# Altium PCB PCB2.PcbDoc
Units mm, origin at the board's own origin, x right, y up, seen from the top; angles counter-clockwise.
Board outline 86.42 x 78.14 mm, 2 copper layers (Top Layer, Bottom Layer); 28 components, 24 nets, 76 pads, 0 vias.
Unrouted connection lines stored in the file: 4.
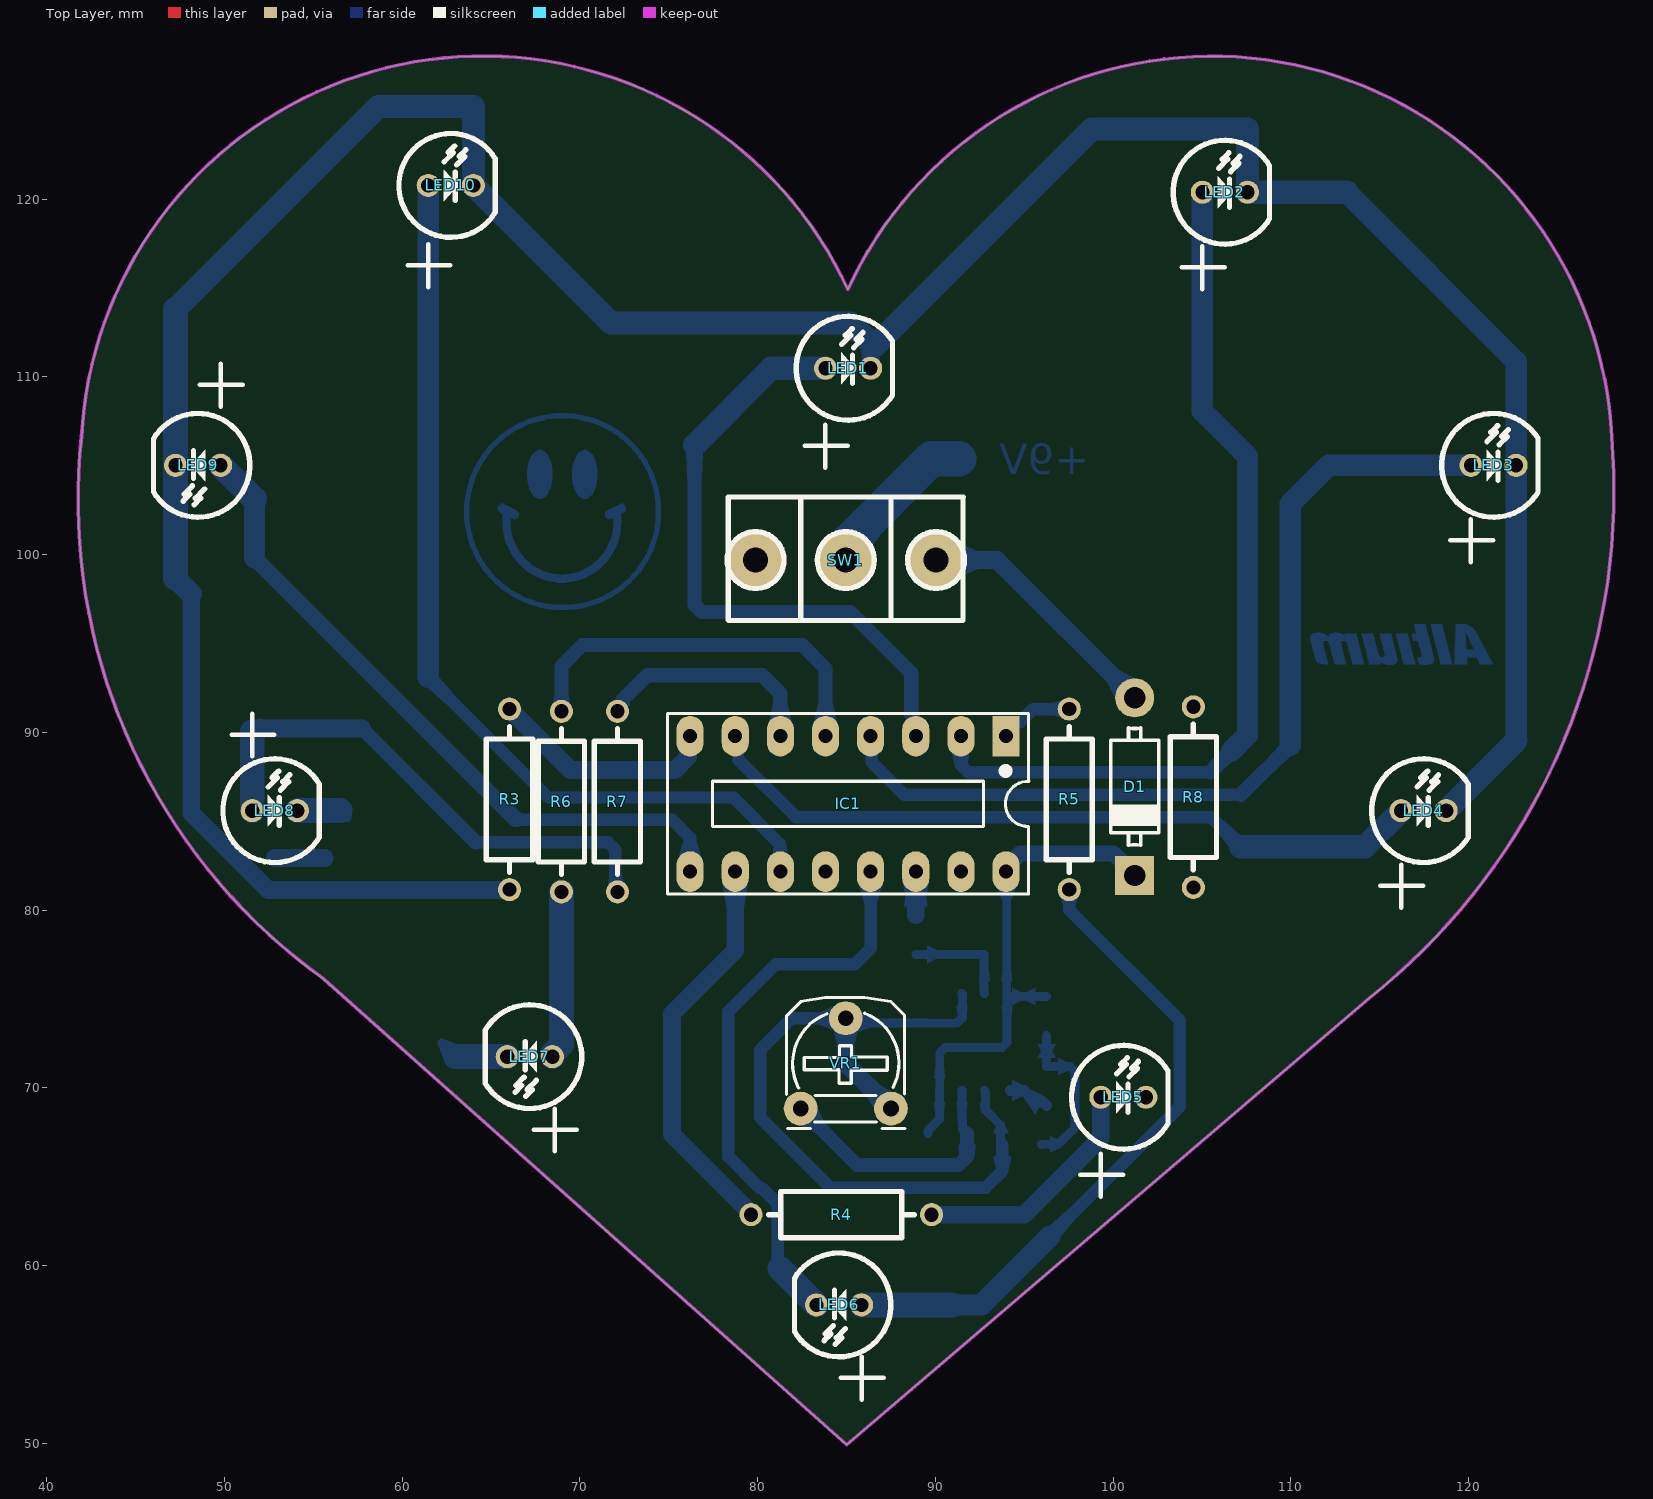
[diagram p0: Top Layer view]
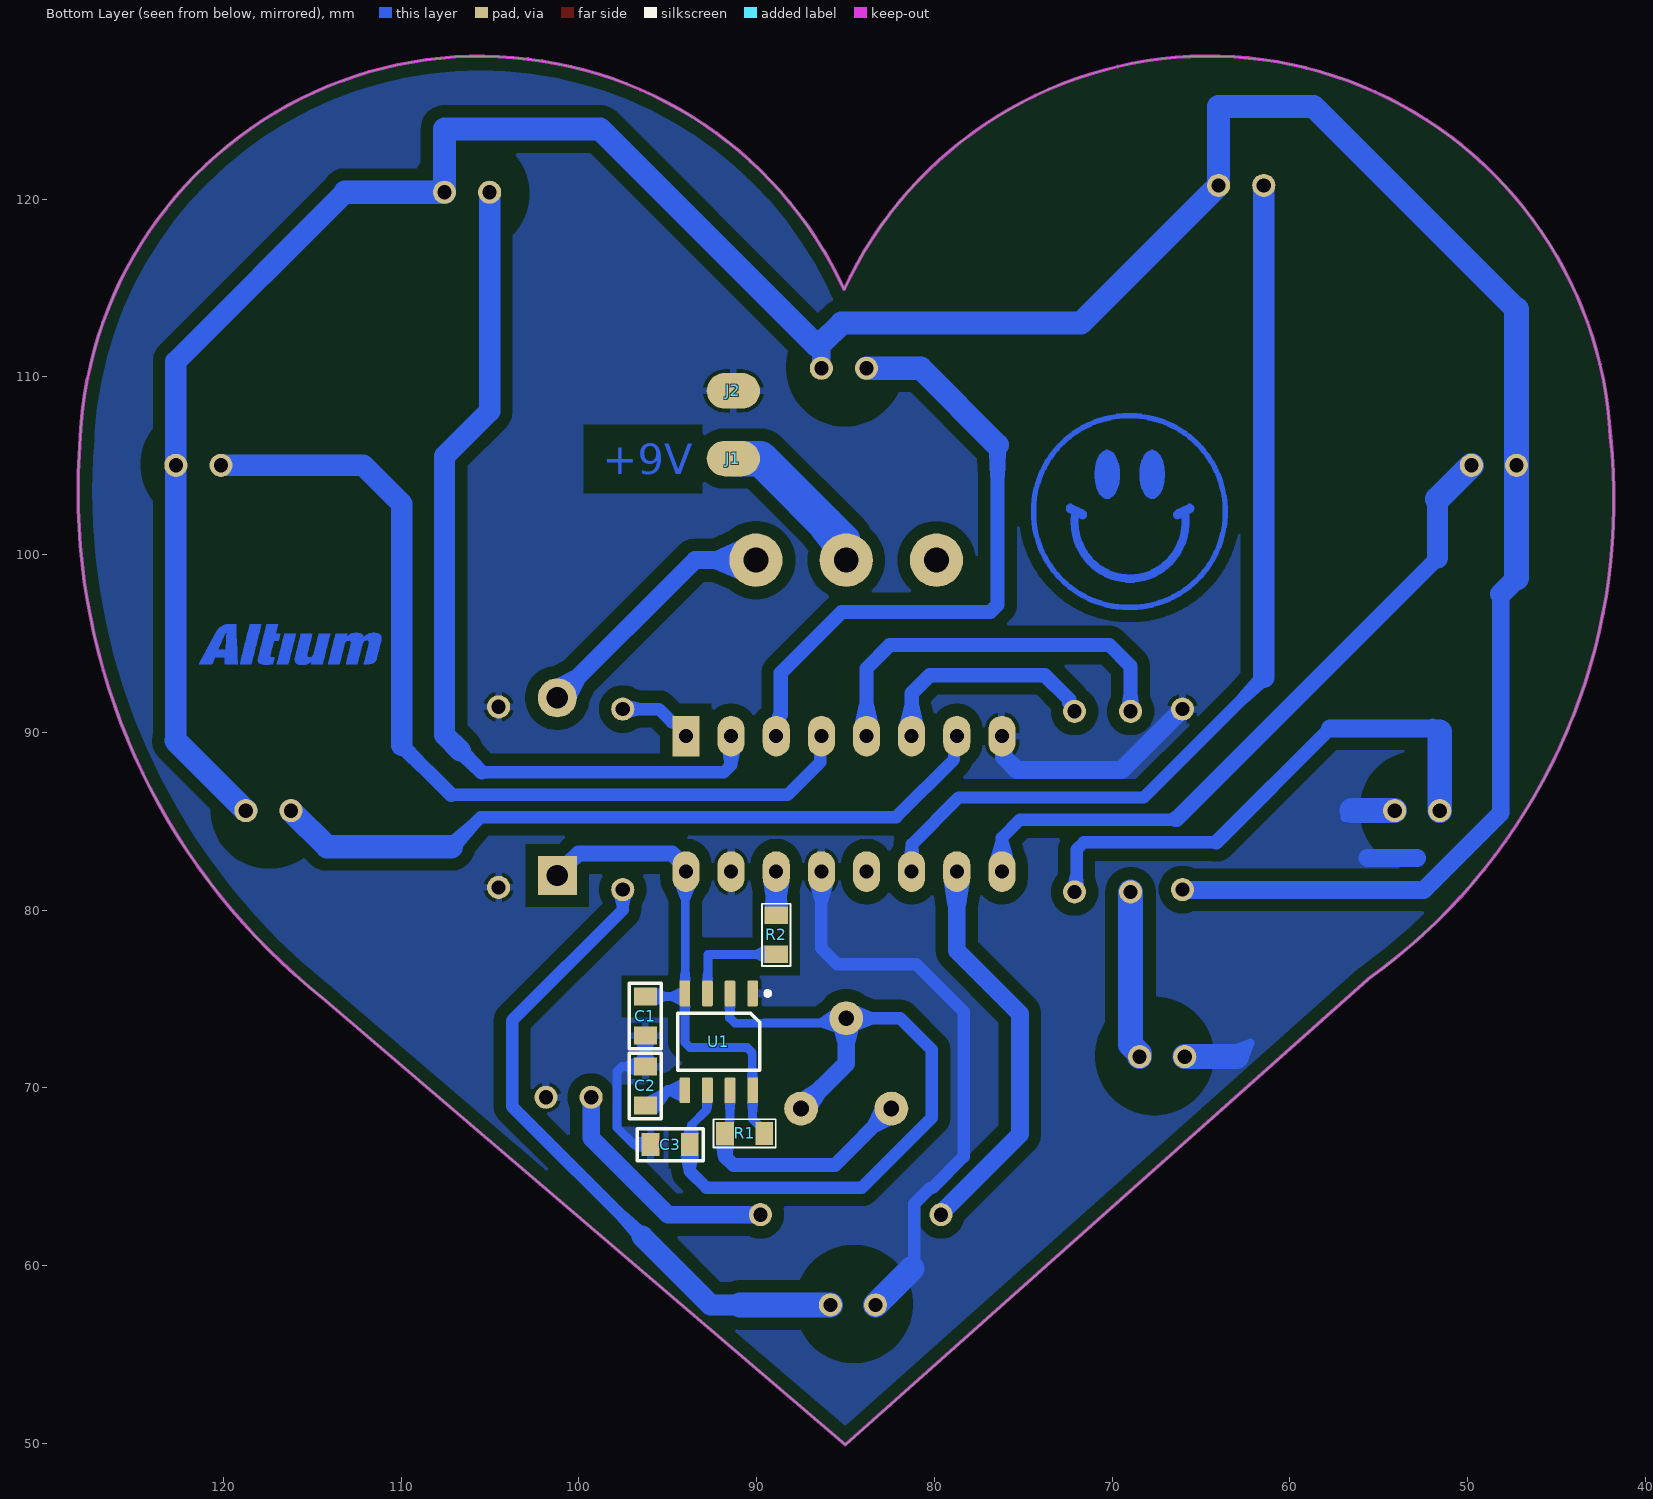
[diagram p1: Bottom Layer view, seen from below]
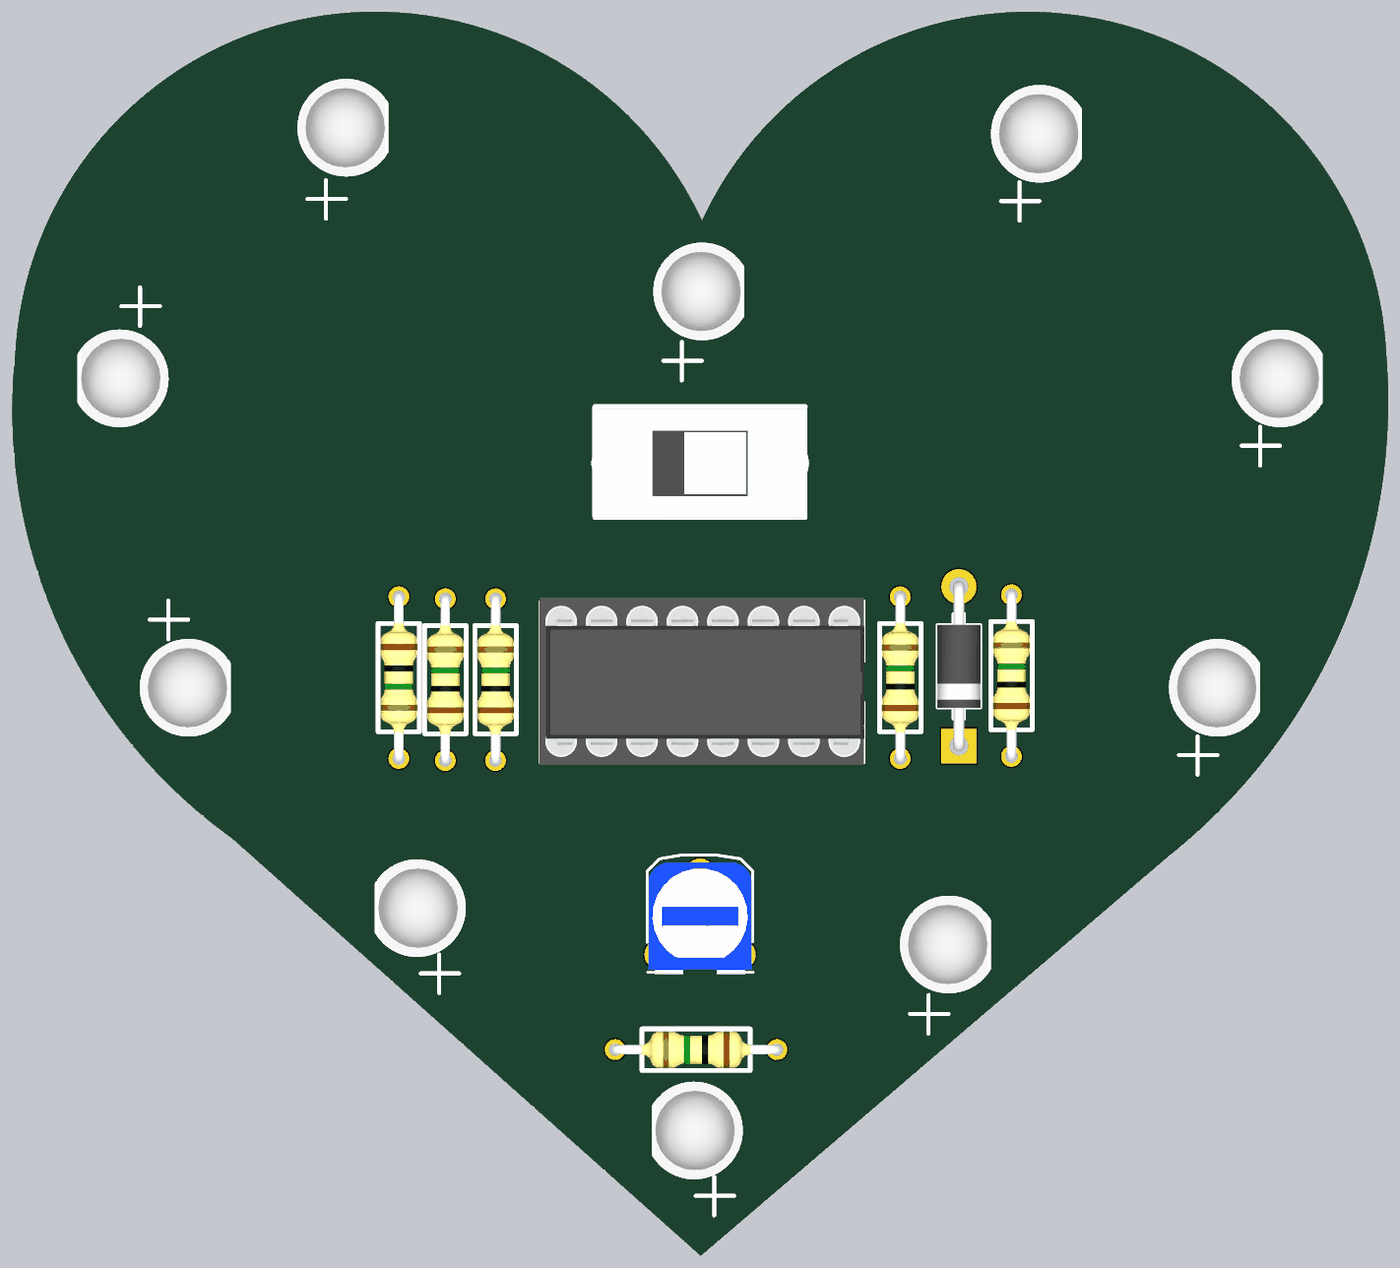
[diagram p2: 3D render of the assembled board from above, using the file's embedded part models]
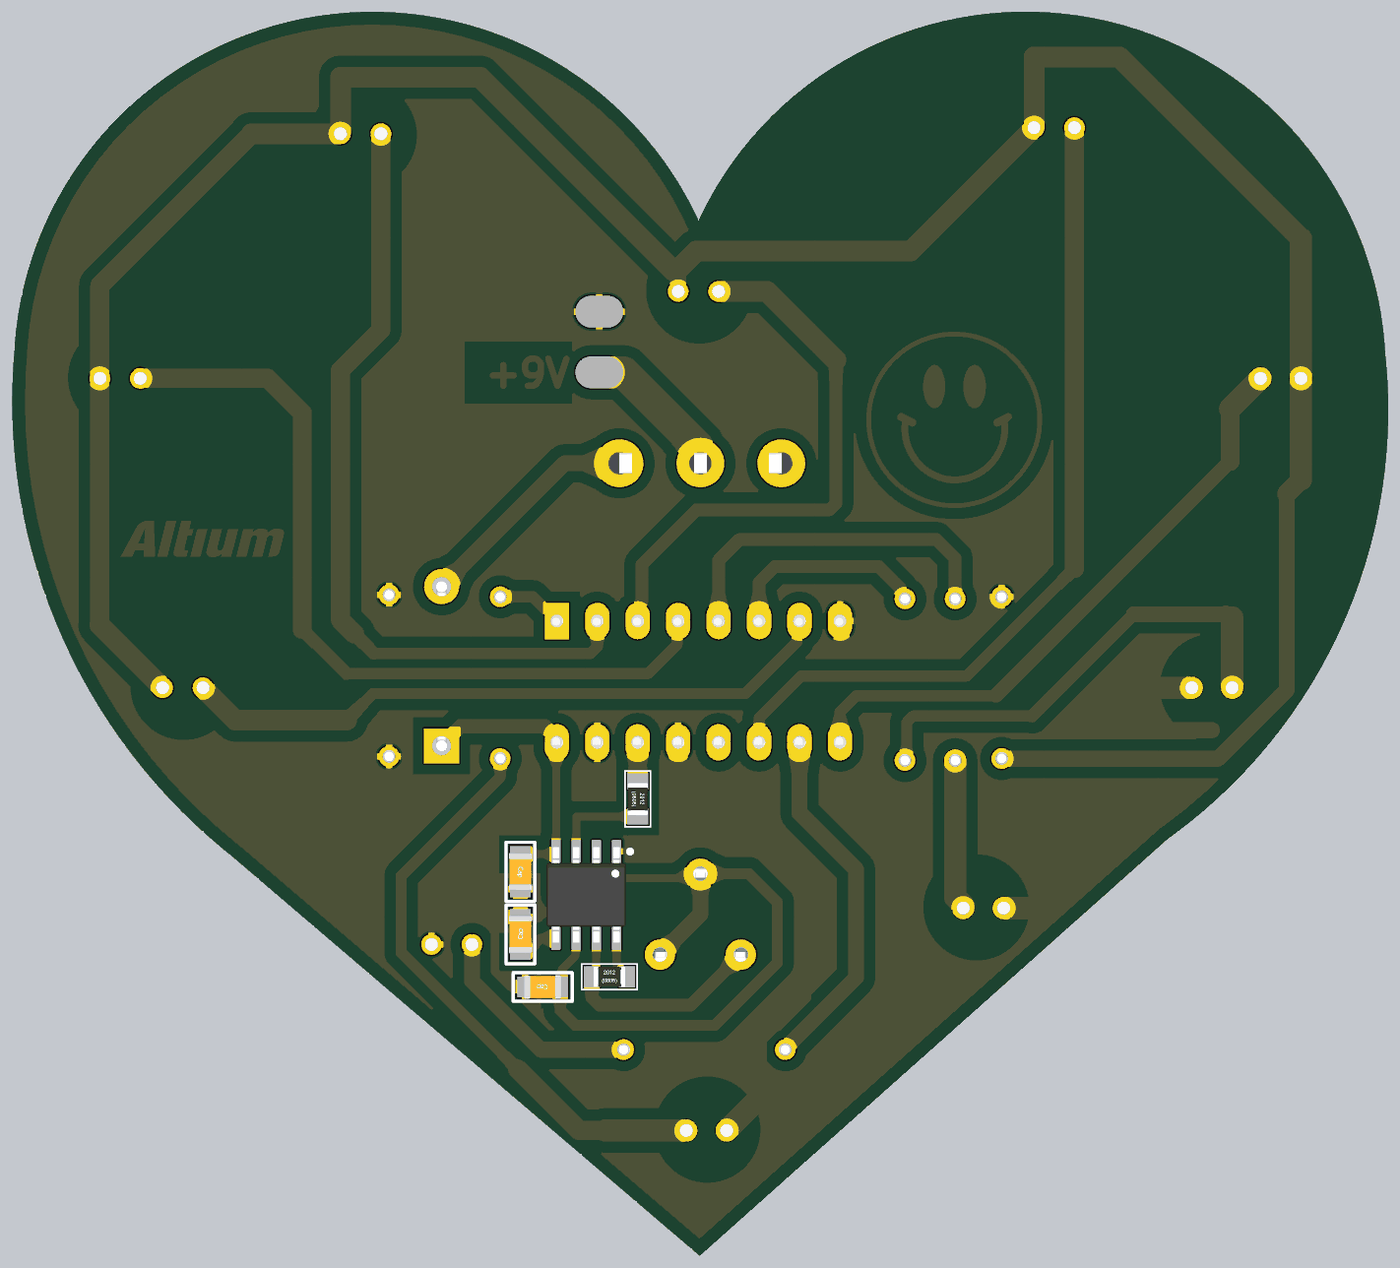
[diagram p3: 3D render of the assembled board from below, using the file's embedded part models]

## Layer stack, top to bottom
Top Solder: solder mask 0.0102, Solder Resist, Dk 3.5
Top Layer: signal copper 0.0356
Dielectric 1: dielectric 0.32, FR-4, Dk 4.8
Bottom Layer: signal copper 0.0356
Bottom Solder: solder mask 0.0102, Solder Resist, Dk 3.5

## Board outline
55.602,76.114 85.006,49.917 114.411,75.042 ccw(c91.743,103.577) 128.056,106.642 ccw(c105.554,105.522) 85.081,114.925 ccw(c64.545,105.438) 41.956,106.642 ccw(c74.88,103.045)

## Design rules (kind name [scope] priority, off if disabled: settings)
Clearance Clearance_1 [InPolygon] p1: gap=0.7 ignorepadtopadclearanceinfootprint=TRUE
Clearance [All] p2: gap=0.5 ignorepadtopadclearanceinfootprint=TRUE
PolygonConnect [All] p1: connectstyle=Relief reliefconductorwidth=0.4 reliefentries=4 polygonreliefangle="90 Angle" airgapwidth=0.2
RoutingVias [All] p1: holewidth=0.711 width=1.27 viastyle="Through Hole" minholewidth=0.711 minwidth=1.27 maxholewidth=0.711 maxwidth=1.27
SolderMaskExpansion [All] p1: expansion=0.102 istentingtop=FALSE
Width [All] p1: maxlimit=3 minlimit=0.5 preferedwidth=1
30 further rules are at their usual default settings.

## Components (designator, comment, footprint, x,y, rotation, side; value= is the part's Value field where it differs from the comment)
C1 "30pF-0805" CAP0805 96.266,74.041 r270 bottom
C2 "30pF-0805" CAP0805 96.266,70.104 r90 bottom
C3 "30pF-0805" CAP0805 94.869,66.802 r0 bottom
D1 "1KV/1A" DIO-DO41(DO-204AL)-10P-THR 101.219,86.948 r270 top
IC1 "4017" DIP16/W0.3 93.98,89.789 r180 top value=CD4017
J1 "Pad" pad_smd_2x3 91.313,105.41 r90 bottom
J2 "Pad" pad_smd_2x3 91.313,109.22 r90 bottom
LED1 "LED_R_5" LED5R 83.82,110.49 r0 top
LED2 "LED_R_5" LED5R 105.029,120.396 r0 top
LED3 "LED_R_5" LED5R 120.142,105.029 r0 top
LED4 "LED_R_5" LED5R 116.205,85.598 r0 top
LED5 "LED_R_5" LED5R 99.314,69.469 r0 top
LED6 "LED_R_5" LED5R 85.852,57.785 r180 top
LED7 "LED_R_5" LED5R 68.453,71.755 r180 top
LED8 "LED_R_5" LED5R 51.562,85.598 r0 top
LED9 "LED_R_5" LED5R 49.784,105.029 r180 top
LED10 "LED_R_5" LED5R 61.468,120.777 r0 top
R1 "Resistor 10K-0805" RESC2012L 90.678,67.437 r180 bottom value=1m
R2 "Resistor 10K-0805" RESC2012L 88.9,78.613 r270 bottom value=1m
R3 "CF1/4W1KJ25" "RES 1/4W CFR25" 66.04,91.313 r270 top value=470
R4 "CF1/4W1KJ25" "RES 1/4W CFR25" 89.789,62.865 r180 top value=470
R5 "CF1/4W1KJ25" "RES 1/4W CFR25" 97.536,81.153 r90 top value=470
R6 "CF1/4W1KJ25" "RES 1/4W CFR25" 68.961,81.026 r90 top value=470
R7 "CF1/4W1KJ25" "RES 1/4W CFR25" 72.115,81.026 r90 top value=470
R8 "CF1/4W1KJ25" "RES 1/4W CFR25" 104.521,81.28 r90 top value=470
SW1 "SW_SS12D10" SW_SS12D10 84.963,99.695 r180 top
U1 "NE555DR" SOIC-8 92.135,72.586 r270 bottom
VR1 "100K" "Bien Tro Tam Giac Dung" 82.423,68.834 r0 top

## Footprints (in the part's own frame and the unit in brackets; to place one, negate y for a bottom-side part, rotate by r counter-clockwise, add the part's x,y. Pads: shape width x height; smd on the part's side, far side on the other; paste and mask are expansions set on the pad)
"Bien Tro Tam Giac Dung" [mil] "RM065"
  round 75 hole 35: 1(0,0) 2(100,200) 3(200,0)
  silkscreen extent -31,-44 231,246, body extent -28,-50 228,228, height 279
CAP0805 [mm]
  rect 1x1.3 smd: 1(-1.1,0) 2(1.1,0)
  silkscreen extent -1.85,-0.9 1.85,0.9, body extent -1.2,-0.73 1.2,0.73, height 0.65
DIO-DO41(DO-204AL)-10P-THR [mm] "Diode DO-41, Body: 5.2x2.7mm, Pitch 10mm"
  round 2.2 hole 1.2: 1(-5,0)
  rect 2.2x2.2 hole 1.2: 2(5,0)
  silkscreen extent -3.3,-1.35 3.3,1.35, body extent -5.35,-1.35 5.35,1.35, height 2.95
DIP16/W0.3 [mil] "16 PIN, W 300mil, Pin to pin 100mil"
  rect 60x90 hole 31: 1(0,0)
  oval 60x90 hole 31: 2(100,0) 3(200,0) 4(300,0) 5(400,0) 6(500,0) 7(600,0) 8(700,0) 9(700,300) 10(600,300) 11(500,300) 12(400,300) 13(300,300) 14(200,300) 15(100,300) 16(0,300)
  silkscreen extent -50,-50 750,350, body extent -52,-57 752,356, height 299
LED5R [mm] "LED, RED, 2 LEAD, 5mm"
  round 1.3 hole 0.8: 1(0,0) 2(2.54,0)
  silkscreen extent -1.65,-2.92 3.77,2.92, body extent -1.71,-3.01 3.71,3.01, height 12.31
pad_smd_2x3 [mm]
  oval 2x3 smd: 1(0,0)
"RES 1/4W CFR25" [mm] "Axial Device, Thru-Hole; 2 Leads fi 0.55"
  round 1.3 hole 0.8 mask+0.1: 1(0,0) 2(10.16,0)
  silkscreen extent 0.98,-1.3 9.18,1.3, body extent -0.3,-1.16 10.47,1.16, height 2.93
RESC2012L [mm] "Chip Resistor, Body 2.0x1.3mm, IPC High Density"
  rect 1x1.3 smd: 1(-1.1,0) 2(1.1,0)
  silkscreen extent -1.75,-0.8 1.75,0.8, body extent -0.99,-0.62 1.01,0.63, height 0.45
SOIC-8 [mm] "SOIC, 8-Leads, Body 4.91x3.90mm, Pitch 1.27mm, IPC Medium Density"
  rrect25% 1.45x0.6 smd: 1(-2.725,1.905) 2(-2.725,0.635) 3(-2.725,-0.635) 4(-2.725,-1.905) 5(2.725,-1.905) 6(2.725,-0.635) 7(2.725,0.635) 8(2.725,1.905)
  silkscreen extent -2.85,-2.3 1.6,2.88, body extent -3,-2.5 3,2.5, height 1.75
SW_SS12D10 [mm] "CONGTACLON"
  round 3 hole 1.4 mask+0.1: 1(-5.08,0) 2(0,0) 3(5.08,0)
  silkscreen extent -6.68,-3.56 6.68,3.4, body extent -6.5,-3.4 6.5,3.4, height 10.1

## Part data
C1 C2 C3: library part CC0805JRNPO9BN300, "CAP CER 30PF 50V NPO 0805", Manufacturer=Yageo, Operating Temperature="-55°C ~ 125°C", Package / Case="0805 (2012 Metric)", Ratings=-, Supplier Part Number 1=311-4234-1-ND, Temperature Coefficient="C0G, NP0", Tolerance=±5%, Voltage - Rated=50V, Applications="General Purpose", Category=Capacitors, ComponentLink1Description=http://www.yageo.com/documents/recent/UPY-GP_NP0_16V-to-50V_16.pdf, ComponentLink1URL=http://www.yageo.com/documents/recent/UPY-GP_NP0_16V-to-50V_16.pdf, Failure Rate=-, Features="High Voltage", Height - Seated (Max)=-, Lead Spacing=-, Lead Style=-, Manufacturer Part Number=CC0805JRNPO9BN300, Mounting Type="Surface Mount, MLCC", Notification="Current market demand for these product types have resulted in fluctuating and extending lead times. Lead times may differ.", Packaging="Cut Tape (CT)", Part Status=Active, Pricing 1="1=0.15, 10=0.107, 100=0.0503, 500=0.03524, 1000=0.02918 (USD)", RoHS="RoHS Compliant", Size / Dimension="0.079\" L x 0.049\" W (2.00mm x 1.25mm)", Stock 1=0, Supplier 1=Digi-Key, Thickness (Max)="0.028\" (0.70mm)"
D1: library part SMC-1N4007, "DIO GEN 1000V 1A DO41 THR", MFR=NA, LINK=NA, MFR PN=SMC-1N4007, PRICE=NA, UNIT=PCS
IC1: "Decade Counter/Divider with 10 Decoded Outputs", Designed by=VanDungEvn
J1 J2: PackageDocument=20-Nov-2001, ComponentLink1Description="Manufacturer Link", ComponentLink1URL=http://www.molex.com/, ComponentLink2Description=Datasheet, ComponentLink2URL=http://www.molex.com/cmc_upload/common_files/1212003_42878catalogpage.pdf, DatasheetDocument=20-Nov-2001, DrillSize="Nominal, Rounded to nearest 0.05mm", PackageReference=42878-4410, PCB_Layout="Complies with Manufacturer's Recommendation.", PCB_Mounting=Thru-Hole, PCB_Thickness="0.125\"", PerformanceCategory=3, Ports=1, Positions/Loaded="Port1 - 4/2", Published=25-Jun-2002, Publisher="Altium Limited"
LED1 LED2 LED3 LED4 LED5 LED6 LED7 LED8 LED9 LED10: library part LED_RED_5MM, "LED Red 5mm", ComponentLink1Description=Datasheet, ComponentLink1URL="D:\Dropbox\Datasheets\Opto and Illumination\LEDs\SMD LED.pdf", Unit Price=0.0476
R1 R2: library part Resistor, "Semiconductor Resistor", LatestRevisionDate=17-Jul-2002, LatestRevisionNote="Re-released for DXP Platform.", PackageReference=AXIAL-0.5, Published=8-Jun-2000, Publisher="Altium Limited"
R3 R4 R5 R6 R7 R8: "470"
SW1: "CONG TAC GAT LON_HIEULIB"
U1: "Timers & Support Products Precision", High Level Output Current="200 mA", Low Level Output Current="- 200 mA", Manufacturer="Texas Instruments", Maximum Operating Temperature="+ 70 C", Minimum Operating Temperature="0 C", Operating Supply Current="2 mA", Package / Case=SOIC-8, Supplier Part Number 1=595-NE555DR, Supply Voltage - Max="16 V", Supply Voltage - Min="4.5 V", Brand="Texas Instruments", Category="Timers & Support Products", Height="1.58 mm", Length="4.9 mm", Manufacturer Part Number=NE555DR, Minimum Order Quantity=1, Mounting Style=SMD/SMT, Number of Internal Timers="1 Timer", Packaging="Cut Tape", Pricing 1="1=0.370, 10=0.248, 100=0.144, 500=0.117, 1000=0.090, 2500=0.077, 10000=0.070, 25000=0.066, 50000=0.063 (USD)", Product Type="Timers & Support Products", Reeling=True, RoHS="RoHS Compliant", RoHS - Mouser=Y, Series=NE555, Standard Pack Qty=2500, Stock 1=19453, Subcategory="Clock & Timer ICs", Supplier 1=Mouser, Type=Standard, Width="3.91 mm"
VR1: library part "Bien tro tam giac 100K Dung", "Cắm", Chung_Loai=Cắm, Don_Vi=Con, Ma_Hang=MH003711, Ten_Linh_Kien="Biến Trở Tam Giác 104-100K RM065"

## Nets (pads, with @x,y where several pads share a name; then routed paths per layer and width w, separated by ;. In a path a pad name is that pad's centre, name@x,y a point inside that pad or via, vN(x,y) a via of type N, cw(c..) or ccw(c..) an arc to the next point about the centre after c; other vN are vias at no path point)
GND: C1.2 C2.2 C3.2 IC1.8 IC1.13 IC1.15 J2.1 LED5.2 LED6.2 LED7.2 LED8.2 R3.1 R8.1 R8.2 U1.1 | length 64.8
  Bottom Layer w0.3: IC1.15 IC1.15@91.44,82.881
  Bottom Layer w0.5: 56.515,85.598 56.896,85.217 ; 62.23,72.517 62.992,71.755 ; C3.2 95.994,66.827 96.926,66.827 97.866,67.767 97.866,70.911 97.573,71.204 C2.2 C1.2
  Bottom Layer w0.7: 81.259,59.838 81.129,59.968 81.129,63.486 80.25,64.365 80.119,64.365 78.359,66.125 78.359,74.295 81.026,76.962 85.471,76.962 86.36,77.851 IC1.13
  Bottom Layer w1: 52.832,82.931 55.626,82.931 ; R3.1 69.469,87.884 75.353,87.884 76.1,88.63 76.1,89.689 IC1.8
  Bottom Layer w1.4: LED8.2 56.515,85.598 ; 62.992,71.755 LED7.2 ; 81.259,59.838 LED6.2
NetC2_1: C2.1 U1.5 | length 2.4
  Bottom Layer w0.6: U1.5@94.234,69.85 94.996,69.85 95.642,69.204 96.066,69.204 C2.1
NetC3_1: C3.1 U1.2 U1.6 VR1.2 VR1.3 | length 44.3
  Bottom Layer w0.5: VR1.2 85.232,73.645 89.571,73.645 89.58,73.636 91.218,73.636 91.52,73.938 91.52,75.291 U1.2 ; U1.6 92.82,69.811 92.82,68.756 93.667,67.909 93.667,66.904 C3.1
  Bottom Layer w0.7: VR1.2 81.915,73.914 80.137,72.136 80.137,68.326 82.042,66.421 84.074,64.389 92.837,64.389 93.769,65.321 C3.1
  Bottom Layer w1: VR1.2 84.963,71.374 VR1.3
NetD1_1: D1.1 SW1.1 | length 14.4
  Bottom Layer w1: SW1.1 93.472,99.695 D1.1
NetIC1_1: IC1.1 R5.2 | length 4.4
  Bottom Layer w0.7: IC1.1 93.98,90.17 94.392,90.582 94.773,90.582 95.504,91.313 R5.2
NetIC1_2: IC1.2 LED2.1 | length 50.4
  Bottom Layer w0.7: IC1.2 91.44,88.167 91.85,87.757 105.469,87.757
  Bottom Layer w0.8: 105.469,87.757 106.683,88.971
  Bottom Layer w1.2: LED2.1 105.029,108.077 107.569,105.537 107.569,89.857 106.683,88.971
NetIC1_3: IC1.3 LED1.1 | length 35.6
  Bottom Layer w0.8: 76.45,106.172 76.45,97.184 76.86,96.774 85.213,96.774 88.642,93.345 88.642,90.992 88.742,90.892 88.742,89.947 IC1.3
  Bottom Layer w1.3: 76.45,106.172 80.768,110.49 LED1.1
NetIC1_4: IC1.4 LED3.1 | length 51.6
  Bottom Layer w0.7: IC1.4 86.433,89.716 86.433,88.319 88.265,86.487 107.188,86.487
  Bottom Layer w0.8: 107.188,86.487 109.972,89.271
  Bottom Layer w1.2: 109.972,89.271 109.972,102.86 112.141,105.029 LED3.1
NetIC1_5: IC1.5 R6.2 | length 22.2
  Bottom Layer w0.8: R6.2 68.961,93.726 70.147,94.912 82.507,94.912 83.82,93.599 IC1.5
NetIC1_6: IC1.6 R7.2 | length 13.1
  Bottom Layer w0.8: R7.2 72.115,91.348 72.415,91.648 72.415,91.846 73.787,93.218 80.264,93.218 81.28,92.202 IC1.6
NetIC1_7: IC1.7 LED4.1 | length 41.6
  Bottom Layer w0.7: IC1.7 78.898,89.631 78.898,88.488 82.149,85.237 105.517,85.237 107.188,83.566
  Bottom Layer w1.3: 107.188,83.566 114.173,83.566 LED4.1
NetIC1_9: IC1.9 LED9.1 | length 38.9
  Bottom Layer w0.7: 66.421,85.12 66.451,85.09 75.184,85.09 76.2,84.074 IC1.9
  Bottom Layer w0.9: 51.689,99.822 66.391,85.12 66.421,85.12
  Bottom Layer w1.2: 51.689,99.822 51.689,103.124
  Bottom Layer w1.4: LED9.1 51.689,103.124
NetIC1_10: IC1.10 R4.2 | length 22.6
  Bottom Layer w1: IC1.10 78.74,77.724 75.184,74.168 75.184,67.391 79.629,62.946 R4.2
NetIC1_11: IC1.11 LED10.1 | length 52.9
  Bottom Layer w0.7: 61.468,93.091 68.22,86.339 78.634,86.339 81.27,83.703 81.27,82.179 IC1.11
  Bottom Layer w1.2: 61.468,93.091 LED10.1
NetIC1_14: IC1.14 R2.1 | length 2.5
  Bottom Layer w1: R2.1 IC1.14
NetJ1_1: J1.1 SW1.2 | length 9.2
  Bottom Layer w2: SW1.2 85.154,99.886 85.154,100.775 89.789,105.41 J1.1
NetLED1_2: LED1.2 LED2.2 LED3.2 LED4.2 LED9.2 LED10.2 R3.2 | length 177.3
  Bottom Layer w1: 48.133,97.79 48.133,85.471 52.47,81.134 R3.2@66.021,81.134 ; LED1.2 86.36,111.887
  Bottom Layer w1.2: 47.244,98.679 48.133,97.79 ; R3.2@66.021,81.134 R3.2 ; 113.157,120.396 122.682,110.871 LED3.2 122.682,89.535
  Bottom Layer w1.3: 47.244,113.792 58.674,125.222 64.008,125.222 LED10.2 71.755,113.03 85.217,113.03 86.36,111.887 ; 86.614,111.76 98.806,123.952 107.569,123.952 LED2.2 113.157,120.396 ; LED4.2 122.682,89.535
  Bottom Layer w1.4: 47.244,98.679 47.244,113.792
NetLED5_1: LED5.1 R4.1 | length 13.6
  Bottom Layer w1: R4.1 94.996,62.865 99.314,67.183 LED5.1
NetLED6_1: LED6.1 R5.1 | length 37.3
  Bottom Layer w0.7: 96.447,61.649 103.759,68.961 103.759,73.787 97.536,80.01 R5.1
  Bottom Layer w1.2: 90.932,57.785 92.583,57.785 96.447,61.649
  Bottom Layer w1.4: LED6.1 90.932,57.785
NetLED7_1: LED7.1 R6.1 | length 9.5
  Bottom Layer w1.4: LED7.1 68.453,71.917 68.961,72.425 R6.1
NetLED8_1: LED8.1 R7.1 | length 30.5
  Bottom Layer w0.7: 51.562,90.014 51.972,90.424 ; 64.135,83.82 71.59,83.82 72,83.41 72,81.141 R7.1
  Bottom Layer w0.8: 57.736,90.219 64.135,83.82
  Bottom Layer w1: 51.767,90.219 57.736,90.219
  Bottom Layer w1.4: LED8.1 51.562,90.014
NetR1_1: R1.1 U1.7 VR1.1 | length 14.7
  Bottom Layer w0.5: U1.7 91.5,68.13 91.528,68.102 91.528,67.687 R1.1
  Bottom Layer w0.8: VR1.1 85.598,65.659 91.309,65.659 91.778,66.128 R1.1
NetR2_2: R2.2 U1.3 | length 6.1
  Bottom Layer w0.5: R2.2 92.75,77.513 92.75,75.331 U1.3
VCC: C1.1 D1.2 IC1.16 R1.2 U1.4 U1.8 | length 29.1
  Bottom Layer w0.5: R1.2 89.578,67.587 90.23,68.239 U1.8 90.25,69.881 90.25,71.97 90.543,72.263 93.747,72.263 94.04,72.556 U1.4@94.04,75.191 ; IC1.16@94.02,82.129 94.02,75.211 U1.4@94.04,75.191 ; C1.1 94.09,75.141 U1.4@94.04,75.191
  Bottom Layer w0.9: IC1.16@94.02,82.129 IC1.16 93.98,82.408 94.757,83.185 100.033,83.185 100.619,82.599 100.619,82.548 D1.2
pads on no net: IC1.12 SW1.3

## Polygon pours and split planes (outlines as drawn)
GND on Bottom Layer (solid, remove dead copper, pour order 1): 55.602,76.114 85.006,49.917 114.411,75.042 ccw(c91.743,103.577) 128.056,106.642 ccw(c105.554,105.522) 85.081,114.925 ccw(c64.545,105.438) 41.956,106.642 ccw(c74.88,103.045)

## Keep-outs
Keep-Out Layer:
  the board outline again, w0.2

## Other copper
Bottom Layer:
  region: 67.367,105.679 67.398,105.679 67.398,105.71 67.429,105.71 67.429,105.74 67.459,105.74 67.459,105.771 67.49,105.771 67.49,105.802 67.521,105.802 67.521,105.832 67.582,105.832 67.582,105.863 67.674,105.863 67.674,105.894 67.797,105.894 67.797,105.863 67.92,105.863 67.92,105.832 67.95,105.832 67.95,105.802 68.012,105.802 68.012,105.771 68.042,105.771 68.042,105.74 68.073,105.74 68.073,105.71 68.104,105.71 68.104,105.679 68.134,105.679 68.134,105.648 68.165,105.648 68.165,105.587 68.196,105.587 68.196,105.556 68.227,105.556 68.227,105.495 68.257,105.495 68.257,105.403 68.288,105.403 68.288,105.341 68.319,105.341 68.319,105.28 68.349,105.28 68.349,105.157 68.38,105.157 68.38,105.065 68.411,105.065 68.411,104.881 68.441,104.881 68.441,104.175 68.411,104.175 68.411,103.991 68.38,103.991 68.38,103.868 68.349,103.868 68.349,103.776 68.319,103.776 68.319,103.684 68.288,103.684 68.288,103.622 68.257,103.622 68.257,103.561 68.227,103.561 68.227,103.5 68.196,103.5 68.196,103.438 68.165,103.438 68.165,103.408 68.134,103.408 68.134,103.346 68.104,103.346 68.104,103.316 68.073,103.316 68.073,103.285 68.042,103.285 68.042,103.254 67.981,103.254 67.981,103.223 67.95,103.223 67.95,103.193 67.889,103.193 67.889,103.162 67.613,103.162 67.613,103.193 67.551,103.193 67.551,103.223 67.49,103.223 67.49,103.254 67.459,103.254 67.459,103.285 67.429,103.285 67.429,103.316 67.398,103.316 67.398,103.346 67.367,103.346 67.367,103.377 67.336,103.377 67.336,103.438 67.306,103.438 67.306,103.469 67.275,103.469 67.275,103.53 67.244,103.53 67.244,103.592 67.214,103.592 67.214,103.653 67.183,103.653 67.183,103.715 67.152,103.715 67.152,103.837 67.122,103.837 67.122,103.929 67.091,103.929 67.091,104.052 67.06,104.052 67.06,104.328 67.03,104.328 67.03,104.697 67.06,104.697 67.06,104.973 67.091,104.973 67.091,105.096 67.122,105.096 67.122,105.218 67.152,105.218 67.152,105.311 67.183,105.311 67.183,105.372 67.214,105.372 67.214,105.433 67.244,105.433 67.244,105.495 67.275,105.495 67.275,105.556 67.306,105.556 67.306,105.617 67.336,105.617 67.336,105.648 67.367,105.648
  region: 637 vertices and 0 holes, not listed, extent 65.372,98.436 72.585,102.855
  region: 846 vertices and 1 holes, not listed, extent 63.5,96.901 74.549,107.95
  region: 70.682,105.617 70.713,105.617 70.713,105.556 70.743,105.556 70.743,105.495 70.774,105.495 70.774,105.464 70.805,105.464 70.805,105.372 70.835,105.372 70.835,105.311 70.866,105.311 70.866,105.218 70.897,105.218 70.897,105.126 70.927,105.126 70.927,104.942 70.958,104.942 70.958,104.758 70.989,104.758 70.989,104.267 70.958,104.267 70.958,104.083 70.927,104.083 70.927,103.929 70.897,103.929 70.897,103.807 70.866,103.807 70.866,103.715 70.835,103.715 70.835,103.653 70.805,103.653 70.805,103.561 70.774,103.561 70.774,103.53 70.743,103.53 70.743,103.469 70.713,103.469 70.713,103.408 70.682,103.408 70.682,103.377 70.651,103.377 70.651,103.346 70.62,103.346 70.62,103.316 70.59,103.316 70.59,103.285 70.559,103.285 70.559,103.254 70.528,103.254 70.528,103.223 70.467,103.223 70.467,103.193 70.406,103.193 70.406,103.162 70.129,103.162 70.129,103.193 70.068,103.193 70.068,103.223 70.037,103.223 70.037,103.254 70.007,103.254 70.007,103.285 69.945,103.285 69.945,103.316 69.915,103.316 69.915,103.377 69.884,103.377 69.884,103.408 69.853,103.408 69.853,103.438 69.822,103.438 69.822,103.5 69.792,103.5 69.792,103.561 69.761,103.561 69.761,103.622 69.73,103.622 69.73,103.684 69.7,103.684 69.7,103.776 69.669,103.776 69.669,103.868 69.638,103.868 69.638,103.991 69.608,103.991 69.608,104.206 69.577,104.206 69.577,104.85 69.608,104.85 69.608,105.034 69.638,105.034 69.638,105.157 69.669,105.157 69.669,105.249 69.7,105.249 69.7,105.341 69.73,105.341 69.73,105.403 69.761,105.403 69.761,105.464 69.792,105.464 69.792,105.525 69.822,105.525 69.822,105.587 69.853,105.587 69.853,105.617 69.884,105.617 69.884,105.679 69.915,105.679 69.915,105.71 69.945,105.71 69.945,105.74 69.976,105.74 69.976,105.771 70.007,105.771 70.007,105.802 70.068,105.802 70.068,105.832 70.099,105.832 70.099,105.863 70.221,105.863 70.221,105.894 70.344,105.894 70.344,105.863 70.436,105.863 70.436,105.832 70.498,105.832 70.498,105.802 70.528,105.802 70.528,105.771 70.559,105.771 70.559,105.74 70.59,105.74 70.59,105.71 70.62,105.71 70.62,105.679 70.651,105.679 70.651,105.648 70.682,105.648
  region: 116.035,95.12 116.035,95.105 116.05,95.105 116.05,95.043 116.066,95.043 116.066,94.981 116.081,94.981 116.081,94.919 116.097,94.919 116.097,94.857 116.112,94.857 116.112,94.795 116.128,94.795 116.128,94.733 116.143,94.733 116.143,94.671 116.159,94.671 116.159,94.609 116.174,94.609 116.174,94.547 116.19,94.547 116.19,94.485 116.205,94.485 116.205,94.423 116.221,94.423 116.221,94.361 116.236,94.361 116.236,94.299 116.252,94.299 116.252,94.237 116.267,94.237 116.267,94.175 116.283,94.175 116.283,94.113 116.298,94.113 116.298,94.051 116.314,94.051 116.314,93.989 116.329,93.989 116.329,93.927 116.345,93.927 116.345,93.865 116.36,93.865 116.36,93.834 116.995,93.834 116.995,93.881 116.98,93.881 116.98,93.943 116.965,93.943 116.965,94.005 116.949,94.005 116.949,94.067 116.934,94.067 116.934,94.129 116.918,94.129 116.918,94.191 116.903,94.191 116.903,94.253 116.887,94.253 116.887,94.315 116.872,94.315 116.872,94.376 116.856,94.376 116.856,94.438 116.841,94.438 116.841,94.5 116.825,94.5 116.825,94.562 116.81,94.562 116.81,94.624 116.794,94.624 116.794,94.686 116.779,94.686 116.779,94.748 116.763,94.748 116.763,94.81 116.748,94.81 116.748,94.872 116.732,94.872 116.732,94.934 116.717,94.934 116.717,94.996 116.701,94.996 116.701,95.058 116.686,95.058 116.686,95.12 116.67,95.12 116.67,95.182 116.655,95.182 116.655,95.244 116.639,95.244 116.639,95.306 116.624,95.306 116.624,95.368 116.608,95.368 116.608,95.43 116.593,95.43 116.593,95.492 116.577,95.492 116.577,95.538 116.562,95.538 116.562,95.554 115.942,95.554 115.942,95.476 115.958,95.476 115.958,95.414 115.973,95.414 115.973,95.353 115.988,95.353 115.988,95.291 116.004,95.291 116.004,95.229 116.019,95.229 116.019,95.167 116.035,95.167 116.035,95.136
  region: 119.01,94.082 119.01,94.144 118.994,94.144 118.994,94.206 118.979,94.206 118.979,94.268 118.963,94.268 118.963,94.33 118.948,94.33 118.948,94.392 118.932,94.392 118.932,94.454 118.917,94.454 118.917,94.516 118.901,94.516 118.901,94.578 118.886,94.578 118.886,94.64 118.87,94.64 118.87,94.702 118.855,94.702 118.855,94.764 118.839,94.764 118.839,94.826 118.824,94.826 118.824,94.888 118.808,94.888 118.808,94.95 118.793,94.95 118.793,95.012 118.777,95.012 118.777,95.074 118.762,95.074 118.762,95.136 118.746,95.136 118.746,95.198 118.731,95.198 118.731,95.26 118.715,95.26 118.715,95.322 118.7,95.322 118.7,95.384 118.684,95.384 118.684,95.445 118.669,95.445 118.669,95.507 118.653,95.507 118.653,95.569 118.638,95.569 118.638,95.631 118.622,95.631 118.622,95.693 118.607,95.693 118.607,95.755 118.591,95.755 118.591,95.817 118.576,95.817 118.576,95.864 118.56,95.864 118.56,95.926 118.545,95.926 118.545,95.988 118.529,95.988 118.529,96.05 118.514,96.05 118.514,96.096 117.879,96.096 117.879,96.05 117.894,96.05 117.894,95.988 117.91,95.988 117.91,95.926 117.925,95.926 117.925,95.864 117.941,95.864 117.941,95.802 117.956,95.802 117.956,95.74 117.972,95.74 117.972,95.678 117.987,95.678 117.987,95.616 118.003,95.616 118.003,95.554 118.018,95.554 118.018,95.492 118.033,95.492 118.033,95.43 118.049,95.43 118.049,95.368 118.064,95.368 118.064,95.306 118.08,95.306 118.08,95.244 118.095,95.244 118.095,95.182 118.111,95.182 118.111,95.12 118.126,95.12 118.126,95.058 118.142,95.058 118.142,94.996 118.157,94.996 118.157,94.934 118.173,94.934 118.173,94.872 118.188,94.872 118.188,94.81 118.204,94.81 118.204,94.748 118.219,94.748 118.219,94.686 118.235,94.686 118.235,94.624 118.25,94.624 118.25,94.562 118.266,94.562 118.266,94.5 118.281,94.5 118.281,94.438 118.297,94.438 118.297,94.376 118.312,94.376 118.312,94.315 118.328,94.315 118.328,94.253 118.343,94.253 118.343,94.191 118.359,94.191 118.359,94.129 118.374,94.129 118.374,94.067 118.39,94.067 118.39,94.005 118.405,94.005 118.405,93.943 118.421,93.943 118.421,93.881 118.436,93.881 118.436,93.834 119.071,93.834 119.071,93.896 119.056,93.896 119.056,93.958 119.041,93.958 119.041,94.02 119.025,94.02 119.025,94.082
  region: 223 vertices and 1 holes, not listed, extent 119.211,93.834 121.38,96.096
  region: 450 vertices and 0 holes, not listed, extent 111.124,93.834 114.114,95.6
  region: 171 vertices and 0 holes, not listed, extent 116.81,93.819 118.064,96.081
  region: 261 vertices and 0 holes, not listed, extent 114.005,93.803 115.988,95.554
  pour cut-out: 52.768,82.309 cw(c52.768,85.642) 49.435,85.642 cw(c52.768,85.642) 52.768,88.976 cw(c52.768,85.642) 56.102,85.642 cw(c52.768,85.642)
  pour cut-out: 67.627,68.466 cw(c67.627,71.799) 64.294,71.799 cw(c67.627,71.799) 67.627,75.133 cw(c67.627,71.799) 70.961,71.799 cw(c67.627,71.799)
  pour cut-out: 84.531,54.508 cw(c84.531,57.841) 81.198,57.841 cw(c84.531,57.841) 84.531,61.175 cw(c84.531,57.841) 87.865,57.841 cw(c84.531,57.841)
  pour cut-out: 117.424,82.321 cw(c117.424,85.654) 114.091,85.654 cw(c117.424,85.654) 117.424,88.988 cw(c117.424,85.654) 120.758,85.654 cw(c117.424,85.654)
  pour cut-out: 121.348,101.74 cw(c121.348,105.073) 118.015,105.073 cw(c121.348,105.073) 121.348,108.407 cw(c121.348,105.073) 124.682,105.073 cw(c121.348,105.073)
  pour cut-out: 106.108,116.98 cw(c106.108,120.313) 102.775,120.313 cw(c106.108,120.313) 106.108,123.647 cw(c106.108,120.313) 109.442,120.313 cw(c106.108,120.313)
  pour cut-out: 85.039,107.213 cw(c85.039,110.546) 81.706,110.546 cw(c85.039,110.546) 85.039,113.88 cw(c85.039,110.546) 88.373,110.546 cw(c85.039,110.546)
  pour cut-out: 62.674,117.488 cw(c62.674,120.821) 59.341,120.821 cw(c62.674,120.821) 62.674,124.155 cw(c62.674,120.821) 66.008,120.821 cw(c62.674,120.821)
  pour cut-out: 48.54,101.613 cw(c48.54,104.947) 45.207,104.947 cw(c48.54,104.947) 48.54,108.281 cw(c48.54,104.947) 51.874,104.947 cw(c48.54,104.947)
  text "+9V" at 98.66,104.54 h1.7

## Silkscreen, mask and mechanical layers (free items; w line width, h text height)
Top Overlay:
  lines w0.254: 48.62,109.563 51.033,109.563 ; 49.784,108.331 49.784,110.744 ; 50.398,89.878 52.811,89.878 ; 51.562,88.646 51.562,91.059 ; 60.304,116.294 62.717,116.294 ; 61.468,115.062 61.468,117.475 ; 67.416,67.653 69.829,67.653 ; 68.58,66.421 68.58,68.834 ; 82.656,106.134 85.069,106.134 ; 83.82,104.902 83.82,107.315 ; 84.688,53.683 87.101,53.683 ; 85.852,52.451 85.852,54.864 ; 98.15,65.113 100.563,65.113 ; 99.314,63.881 99.314,66.294 ; 103.865,116.167 106.278,116.167 ; 105.029,114.935 105.029,117.348 ; 115.041,81.369 117.454,81.369 ; 116.205,80.137 116.205,82.55 ; 118.978,100.8 121.391,100.8 ; 120.142,99.568 120.142,101.981

## Text inside footprints (layer, text, board x,y; h text height)
R3: Mechanical 1 "R?" at 66.04,91.233 h0.5 r270
R4: Mechanical 1 "R?" at 89.709,62.865 h0.5 r180
R5: Mechanical 1 "R?" at 97.536,81.233 h0.5 r90
R6: Mechanical 1 "R?" at 68.961,81.106 h0.5 r90
R7: Mechanical 1 "R?" at 72.115,81.106 h0.5 r90
R8: Mechanical 1 "R?" at 104.521,81.36 h0.5 r90
SW1: Top Assembly "2" at 85.363,100.295 h1.2 r180; Top Assembly "1" at 90.243,100.295 h1.2 r180; Top Assembly "3" at 80.283,100.295 h1.2 r180